# Altium PCB PCB3.PcbDoc
Units mil, origin at the board's own origin, x right, y up, seen from the top; angles counter-clockwise.
Board outline 1680 x 1375 mil, 2 copper layers (Top Layer, Bottom Layer); 24 components, 29 nets, 108 pads, 0 vias.
Unrouted connection lines stored in the file: 60.
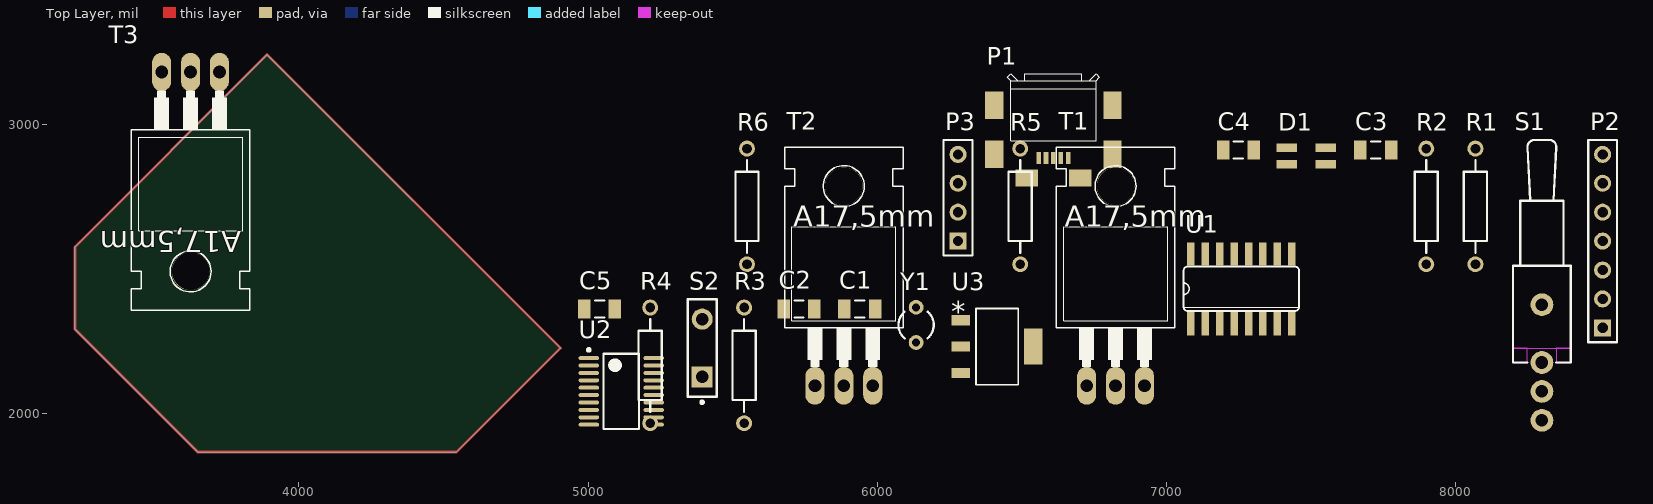
[diagram p0: Top Layer view]
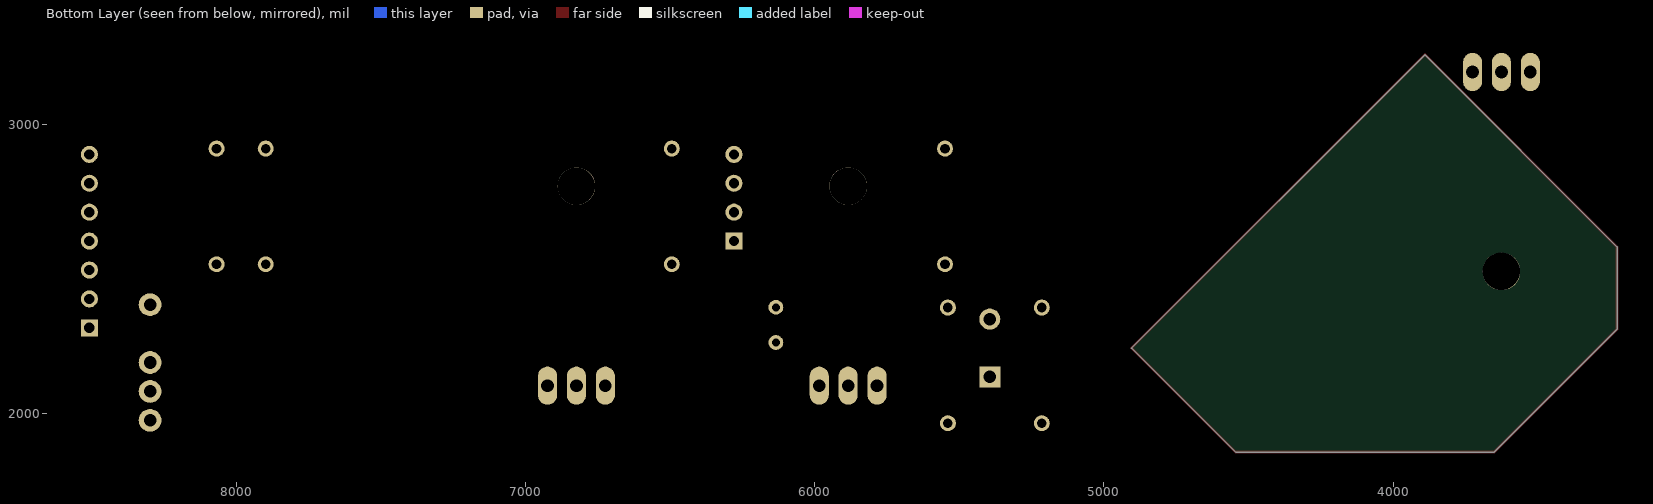
[diagram p1: Bottom Layer view, seen from below]

## Layer stack, top to bottom
Top Solder: solder mask 0.4, Solder Resist, Dk 3.5
Top Layer: signal copper 1.4
Dielectric 1: dielectric 12.6, FR-4, Dk 4.8
Bottom Layer: signal copper 1.4
Bottom Solder: solder mask 0.4, Solder Resist, Dk 3.5

## Board outline
3225,2290 3650,1865 4545,1865 4905,2225 3890,3240 3225,2575

## Design rules (kind name [scope] priority, off if disabled: settings)
Clearance [All] p1: gap=10 ignorepadtopadclearanceinfootprint=FALSE except(0: Arc-Hole Track-Hole SMDPad-Hole THPad-Hole Via-Hole Fill-Hole Poly-Hole Region-Hole Text-Hole)
PolygonConnect [All] p1: connectstyle=Relief reliefconductorwidth=10 reliefentries=4 polygonreliefangle="90 Angle" airgapwidth=10
RoutingVias [All] p1: holewidth=28 width=50 viastyle="Through Hole" minholewidth=28 minwidth=50 maxholewidth=28 maxwidth=50
SolderMaskExpansion [All] p1: expansion=4
Width [All] p1: maxlimit=10 minlimit=10 preferedwidth=10
30 further rules are at their usual default settings.

## Classes and differential pairs
component class Sheet1: C1 C2 C3 C4 C5 D1 P1 P2 P3 R1 R2 R3 R4 S2 T1 T2 T3 U1 U2 U3 Y1 ""

## Components (designator, comment, footprint, x,y, rotation, side; value= is the part's Value field where it differs from the comment)
C1 "Cap Semi" C1206 5940,2360 r0 top value=22pF
C2 "Cap Semi" C1206 5730,2360 r0 top value=22pF
C3 "Cap Semi" C1206 7725,2910 r0 top value=100pF
C4 "Cap Semi" C1206 7250,2910 r0 top value=100pF
C5 "Cap Semi" C1206 5040,2360 r0 top value=100pF
D1 "smd3528" PLCC4 7485,2890 r0 top
P1 "ZX62M-B-5P(01)" HRS_ZX62M-B-5P(01) 6610,3015 r180 top
P2 "Header 7" HDR1X7 8510,2295 r90 top
P3 "Header 4" HDR1X4 6280,2595 r90 top
R1 "Res2" AXIAL-0.4 8070,2715 r90 top value=1K
R2 "Res2" AXIAL-0.4 7900,2715 r90 top value=1K
R3 "Res2" AXIAL-0.4 5540,2165 r90 top value=10K
R4 "Res2" AXIAL-0.4 5215,2165 r90 top value=100
R5 "Res2" AXIAL-0.4 6495,2715 r90 top value=10K
R6 "Res2" AXIAL-0.4 5550,2715 r90 top value=10K
S1 "SW-SPDT" TL36WW15050 8300,2175 r90 top
S2 "SW-PB" SPST-2 5395,2225 r90 top
T1 "IRF530" TO220 6825,2345 r0 top
T2 "IRF530" TO220 5885,2345 r0 top
T3 "IRF530" TO220 3625,2930 r180 top
U1 "CH340" SO16 7260,2430 r0 top
U2 "STM32F030F4P6" STM-TSSOP20_N 5115,2075 r0 top
U3 "LM2937IMP-3.3" SOT230P700X180-4N 6415,2230 r0 top
Y1 "12MHZ" R38 6135,2305 r0 top

## Footprints (in the part's own frame and the unit in brackets; to place one, negate y for a bottom-side part, rotate by r counter-clockwise, add the part's x,y. Pads: shape width x height; smd on the part's side, far side on the other; paste and mask are expansions set on the pad)
AXIAL-0.4 [mm] "Axial Device, Thru-Hole; 2 Leads; 0.4 in Pin Spacing"
  round 1.4 hole 0.85: 1(-5.08,0) 2(5.08,0)
  silkscreen extent -4.06,-1.02 4.06,1.02
C1206 [mm] "Chip Capacitor, Body 3.2x1.6mm, IPC High Density"
  rect 1.1x1.7 smd: 1(-1.35,0) 2(1.35,0)
  silkscreen extent -0.4,-0.75 0.4,0.75, body extent -1.7,-0.9 1.7,0.9, height 1.3
HDR1X4 [mm] "Connector; Header; 4 Position"
  rect 1.5x1.5 hole 0.9: 1(0,0)
  round 1.5 hole 0.9: 2(2.54,0) 3(5.08,0) 4(7.62,0)
  silkscreen extent -1.27,-1.27 8.89,1.27
HDR1X7 [mm] "Connector; Header; 7 Position"
  rect 1.5x1.5 hole 0.9: 1(0,0)
  round 1.5 hole 0.9: 2(2.54,0) 3(5.08,0) 4(7.62,0) 5(10.16,0) 6(12.7,0) 7(15.24,0)
  silkscreen extent -1.27,-1.27 16.51,1.27
HRS_ZX62M-B-5P(01) [mm]
  rect 0.4x1.05 smd: 1(-1.3,3.355) 2(-0.65,3.355) 3(0,3.355) 4(0.65,3.355) 5(1.3,3.355)
  rect 1.6x2.4 smd: S1(5.2,-1.27) S2(-5.2,-1.27) S3(-5.2,3.03) S6(5.2,3.03)
  rect 2x1.5 smd: S4(-2.35,5.13) S5(2.35,5.13)
  silkscreen extent -4.05,-4.02 4.05,1.83
PLCC4 [mm]
  rect 1.8x0.75 smd: 1(1.7,-0.725) 2(-1.7,-0.725) 3(-1.7,0.725) 4(1.7,0.725)
R38 [mm] "Crystal, Thru-Hole; 2 Leads; Body 3.1 x 8.2 mm (Dia.xH)"
  round 1.3 hole 0.7: 1(0,1.55) 2(0,-1.55)
  silkscreen extent -1.55,-1.19 1.55,1.17
SO16 [mil]
  rect 26x80 smd: 1(-175,-121) 2(-125,-121) 3(-75,-121) 4(-25,-121) 5(25,-121) 6(75,-121) 7(125,-121) 8(175,-121) 9(175,121) 10(125,121) 11(75,121) 12(25,121) 13(-25,121) 14(-75,121) 15(-125,121) 16(-175,121)
  silkscreen extent -200,-77 200,77
SOT230P700X180-4N [mil]
  rect 64x35 smd: 1(-126,91) 2(-126,0) 3(-126,-91)
  rect 64x125 smd: 4(126,0)
  silkscreen extent -73,-132 73,132
SPST-2 [mm] "Switch; 2 Leads"
  rect 1.85x1.85 hole 1.1: 1(-2.54,0)
  round 1.85 hole 1.1: 2(2.54,0)
  silkscreen extent -4.89,-1.27 4.28,1.27
STM-TSSOP20_N [mm] "SOP, 20-Leads, Body 6.6x4.5mm, Pitch 0.65mm, IPC Medium Density"
  oval 1.8x0.35 smd: 1(-2.85,2.925) 2(-2.85,2.275) 3(-2.85,1.625) 4(-2.85,0.975) 5(-2.85,0.325) 6(-2.85,-0.325) 7(-2.85,-0.975) 8(-2.85,-1.625) 9(-2.85,-2.275) 10(-2.85,-2.925) 11(2.85,-2.925) 12(2.85,-2.275) 13(2.85,-1.625) 14(2.85,-0.975) 15(2.85,-0.325) 16(2.85,0.325) 17(2.85,0.975) 18(2.85,1.625) 19(2.85,2.275) 20(2.85,2.925)
  silkscreen extent -2.97,-3.3 1.55,3.77, body extent -2.25,-3.3 2.25,3.3, height 1.2
TL36WW15050 [mm] "Switch; 4 Leads"
  round 2 hole 1.1: 1(0,0) 2(-2.54,0) 3(-5.08,0) M(5.08,0)
  Top Layer keep-out region: 0,-1.27 0,-2.54 1.27,-2.54 1.27,-1.27
  Top Layer keep-out region: 0,2.54 0,1.27 1.27,1.27 1.27,2.54
  Top Layer keep-out region: 1.27,2.54 1.27,-2.54 8.509,-2.54 8.509,2.54
  silkscreen extent 0,-2.54 19.56,2.54
TO220 [mil]
  oval 66x132 hole 44: 1(-100,-250) 2(0,-250) 3(100,-250)
  round 130 hole 130 unplated: None(0,440)
  silkscreen extent -205,-185 205,575

## Part data
C1 C2 C3 C4 C5: "Capacitor (Semiconductor SIM Model)", LatestRevisionDate=29-May-2009, LatestRevisionNote="IPC-7351 Footprint Added.", PackageDescription="Chip Capacitor", PackageReference=C1206, Published=8-Jun-2000, Publisher="Altium Limited"
D1: library part 67-23SDRSUGSUBC/TR8, "SMD-LED RGB 112/216/57mcd PLCC", Package=None, Availability=Warning, MF=Everlight, MP=67-23SDRSUGSUBC/TR8, Price=None
P1: "Conn Micro USB 2.0 Type B RCP 5 POS 0.65mm Solder RA SMD 5 Terminal 1 Port T/R", Package=None, Availability=Unavailable, MF=Hirose, MP=ZX62M-B-5P(01), Price=None
P2: "Header, 7-Pin", LatestRevisionDate=17-Jul-2002, LatestRevisionNote="Re-released for DXP Platform.", Publisher="Altium Limited"
P3: "Header, 4-Pin", LatestRevisionDate=17-Jul-2002, LatestRevisionNote="Re-released for DXP Platform.", Publisher="Altium Limited"
R1 R2 R3 R4 R5 R6: "Resistor", LatestRevisionDate=17-Jul-2002, LatestRevisionNote="Re-released for DXP Platform.", PackageDescription="Axial Device, Thru-Hole; 2 Leads; 0.4 in Pin Spacing", PackageReference=AXIAL-0.4, Published=8-Jun-2000, Publisher="Altium Limited"
S1: "SPDT Subminiature Toggle Switch, Right Angle Mounting, Vertical Actuation", ComponentLink1Description="Manufacturer Link", ComponentLink1URL=http://www.apem.com, DatasheetVersion=05-Dec-2000, LatestRevisionDate=17-Dec-2003, LatestRevisionNote="Schematic revised, PCB Footprint replaced.", PackageDescription="Switch; 4 Leads", PackageReference=TL36WW15050, Published=24-Mar-1999, Publisher="Altium Limited"
S2: "Switch", LatestRevisionDate=17-Jul-2002, LatestRevisionNote="Re-released for DXP Platform.", PackageDescription="Switch; 2 Leads", PackageReference=SPST-2, Published=24-Mar-1999, Publisher="Altium Limited"
T1 T2 T3: library part IRF840, "Trans MOSFET N-CH 500V 8A 3-Pin(3+Tab) TO-220AB", Package="TO-220 Vishay", Availability=Bad, MF=Vishay, MP=IRF840, Price="3.90 USD"
U1: "Eaton / Cutler Hammer CH340 Circuit Breaker 40 Amp 240 Volt AC 3-Pole Plug-On Mount", Package=None, Availability=Bad, MF="Eaton / Cutler Hammer", MP=CH340, Price="248.29 USD"
U2: "ARM Cortex-M0 32-bit MCU, 16 KB Flash, 4 KB Internal RAM, 15 I/Os, 20-pin TSSOP, -40 to 85 degC, Tube", I/Os (High Current)=15, Operating Frequency(F) (Processor speed) (MHz)=48, Supplier Part Number 1=497-14044-5-ND, Supply Voltage(Vcc) min (V)=2.4, ComponentLink1Description="Manufacturer URL", ComponentLink1URL=http://www.st.com/web/en/home.html, ComponentLink2Description=Datasheet, ComponentLink2URL=http://www.st.com/st-web-ui/static/active/en/resource/technical/document/datasheet/DM00088500.pdf, ComponentLink3Description="Package Specification", ComponentLink3URL=http://www.st.com/st-web-ui/static/active/en/resource/technical/document/datasheet/DM00065136.pdf, Core="ARM Cortex-M0", DatasheetVersion="Rev. 1", FLASH Size (Prog) (kB)=16, Internal RAM Size (kB)=4, Mounting Technology="Surface Mount", PackageDescription="20-Pin Thin Shrink Small Outline Package, 6.5 x 4.4 mm Body, 0.65 mm Pitch", PackageReference=TSSOP20, PackageVersion="Rev. 1, 11/2012", Packing=Tube, PartNumber=STM32F030F4P6, Supplier 1=Digi-Key, Supplier 2=Newark, Supplier 3=Mouser, Supplier Part Number 2=06X3648, Supplier Part Number 3=511-STM32F030F4P6
U3: library part LM2937IMP-12, "Sot-223", Package="SOT-223 Fairchild Semiconductor", Availability=Unavailable, MF="Fairchild Semiconductor", MP=LM2937IMP-12, Price=None
Y1: library part XTAL, "Crystal Oscillator", LatestRevisionDate=17-Jul-2002, LatestRevisionNote="Re-released for DXP Platform.", PackageDescription="Crystal, Thru-Hole; 2 Leads; Body 3.1 x 8.2 mm (Dia.xH)", PackageReference=R38, Published=8-Jun-2000, Publisher="Altium Limited"

## Nets (pads, with @x,y where several pads share a name; then routed paths per layer and width w, separated by ;. In a path a pad name is that pad's centre, name@x,y a point inside that pad or via, vN(x,y) a via of type N, cw(c..) or ccw(c..) an arc to the next point about the centre after c; other vN are vias at no path point)
GND: C1.1 C2.1 C3.1 C4.1 C5.1 P1.5 P3.4 R4.1 R6.2 S1.1 T1.3 T2.3 T3.3 U1.1 U2.15 U3.2 U3.4
NetC1_2: C1.2 U1.7 Y1.1
NetC2_2: C2.2 U1.8 Y1.2
NetC5_2: C5.2 R3.1 S2.1 U2.4
NetD1_1: D1.1 T3.2
NetD1_3: D1.3 T1.2
NetD1_4: D1.4 T2.2
NetP1_1: P1.1 U3.1
NetP1_2: P1.2 U1.6
NetP1_3: P1.3 U1.5
NetP2_1: P2.1 U2.18
NetP2_2: P2.2 U2.17
NetP2_3: P2.3 U2.13
NetP2_4: P2.4 U2.12
NetP2_5: P2.5 U2.11
NetP2_6: P2.6 U2.10
NetP2_7: P2.7 U2.9
NetR1_1: R1.1 U2.1
NetR1_2: R1.2 S1.2
NetR4_2: R4.2 S2.2
NetT1_1: T1.1 U2.6
NetT2_1: T2.1 U2.7
NetT3_1: T3.1 U2.8
NetU1_2: U1.2 U2.3
NetU1_3: U1.3 U2.2
swdclk: P3.3 R6.1 U2.20
swdi: P3.1 R5.1 U2.19
VCC: C3.2 D1.2 P3.2 R2.2 R3.2 R5.2 S1.3 U1.4 U1.16 U2.16 U3.3
VDDA: C4.2 R2.1 U2.5
pads on no net: P1.4 P1.S1 P1.S2 P1.S3 P1.S4 P1.S5 P1.S6 S1.M T1.None T2.None T3.None U1.9 U1.10 U1.11 U1.12 U1.13 U1.14 U1.15 U2.14
copper on no net: | length 4666
  Top Layer w10: 3225,2290 3650,1865 4545,1865 4905,2225 3890,3240 3225,2575 3225,2290

## Text inside footprints (layer, text, board x,y; h text height)
T1: Top Overlay "A17,5mm" at 6649.85,2645.42 h73.82; Mechanical 1 "1" at 6699.94,2335.16 h73.82; Mechanical 1 "2" at 6799.99,2335.16 h73.82; Mechanical 1 "3" at 6900.08,2335.16 h73.82
T2: Top Overlay "A17,5mm" at 5709.85,2645.42 h73.82; Mechanical 1 "1" at 5759.94,2335.16 h73.82; Mechanical 1 "2" at 5859.99,2335.16 h73.82; Mechanical 1 "3" at 5960.08,2335.16 h73.82
T3: Top Overlay "A17,5mm" at 3800.15,2629.58 h73.82 r180; Mechanical 1 "1" at 3750.06,2939.84 h73.82 r180; Mechanical 1 "2" at 3650.01,2939.84 h73.82 r180; Mechanical 1 "3" at 3549.92,2939.84 h73.82 r180
U3: Top Overlay "*" at 6256.75,2314.31 h73.82; Mechanical 1 "*" at 6256.84,2314.25 h73.82